# Altium PCB koruza-move-driver-PCB.PcbDoc
Units mil, origin at the board's own origin, x right, y up, seen from the top; angles counter-clockwise.
Board outline 2362.2 x 2362.2 mil, 2 copper layers (Top Layer, Bottom Layer), stack 50 mil thick; 46 components, 44 nets, 201 pads, 185 vias.
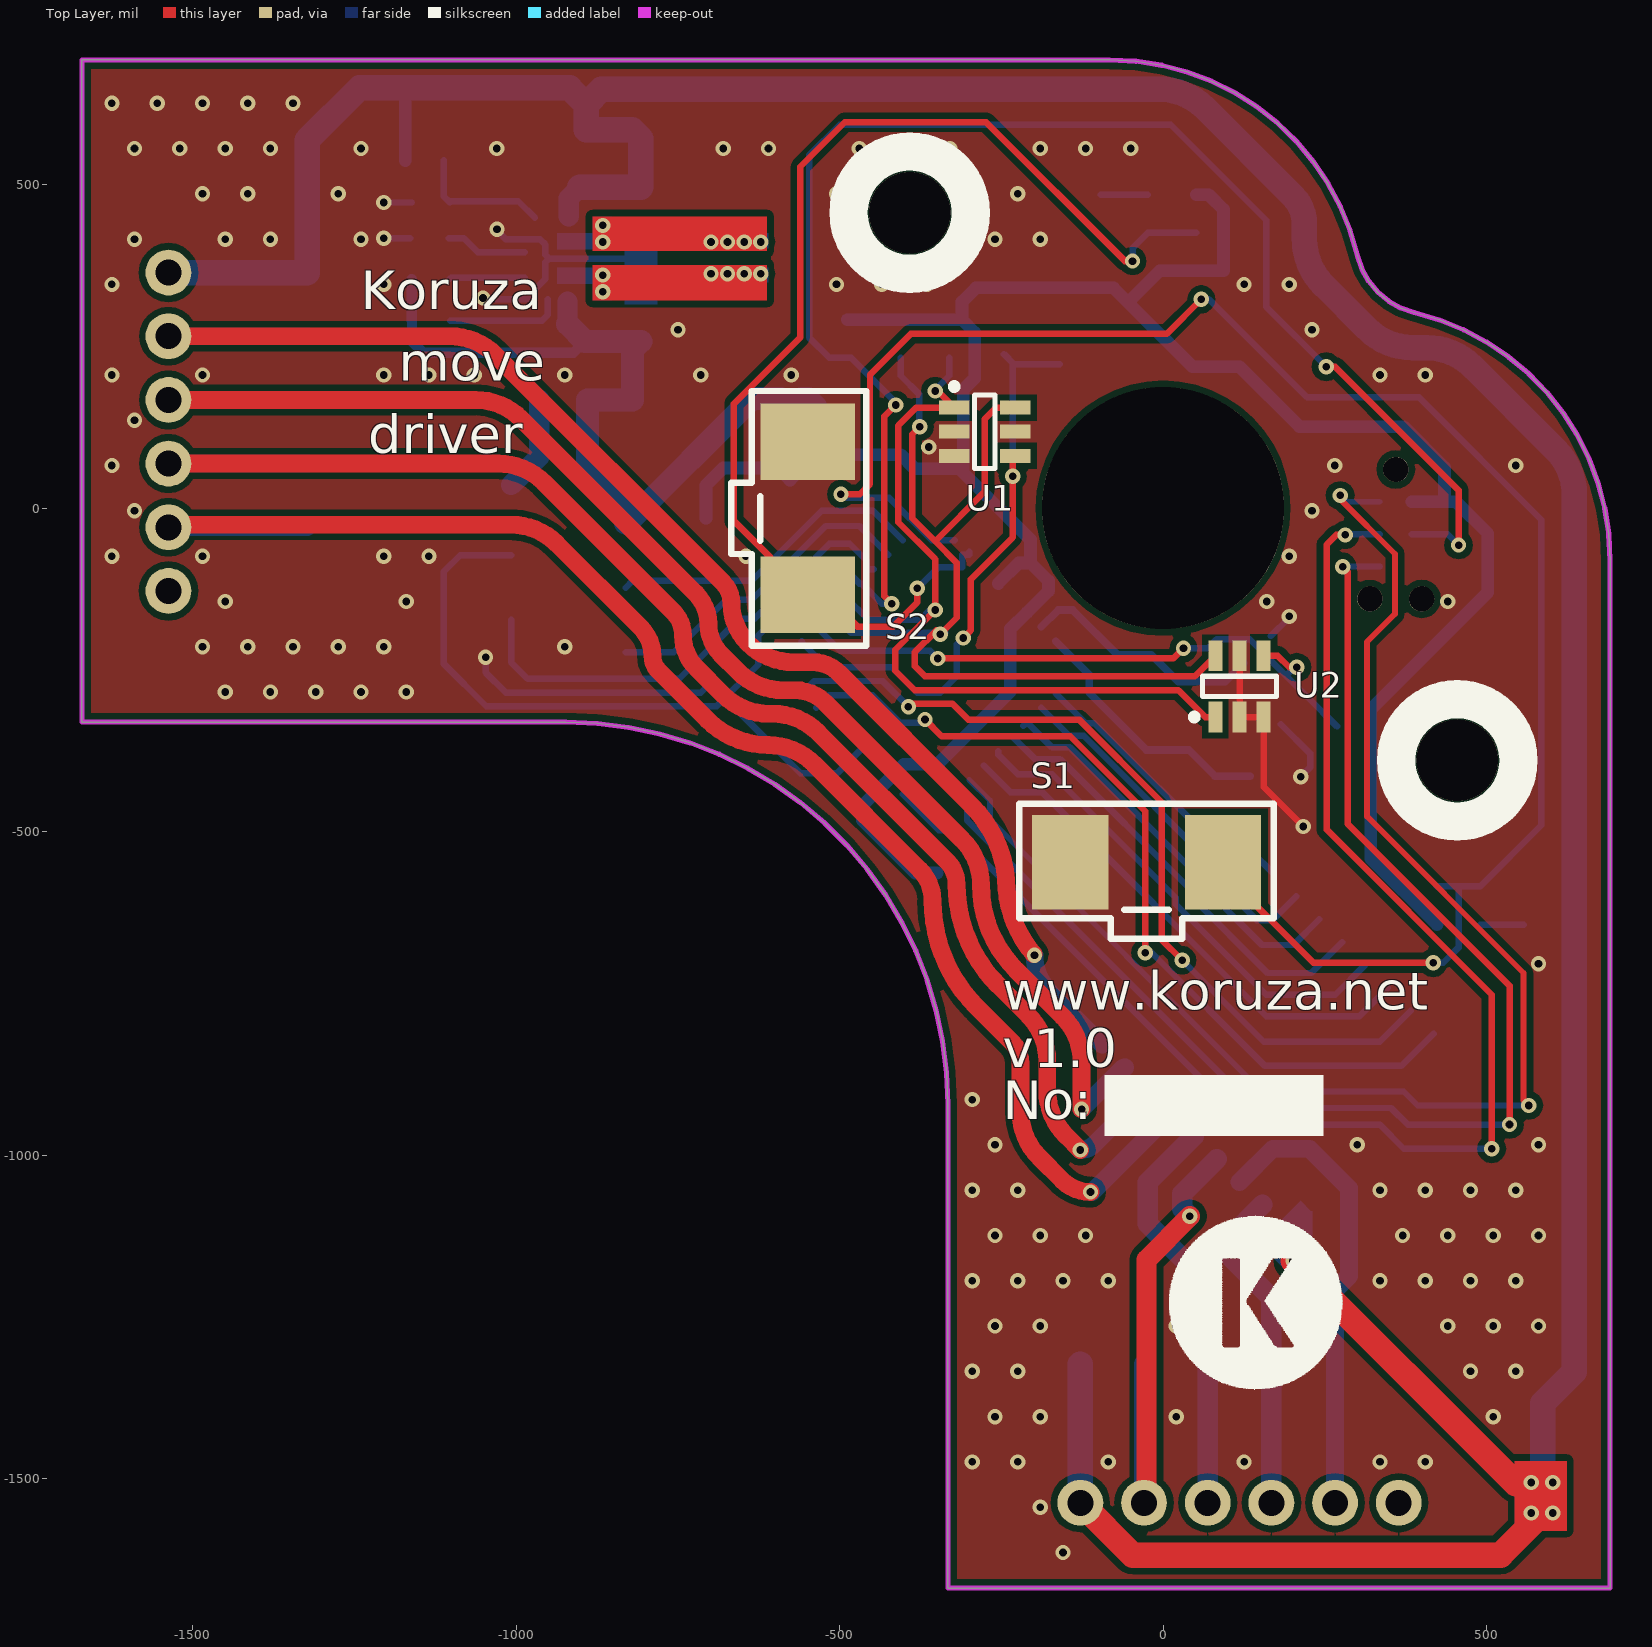
[diagram p0: Top Layer view]
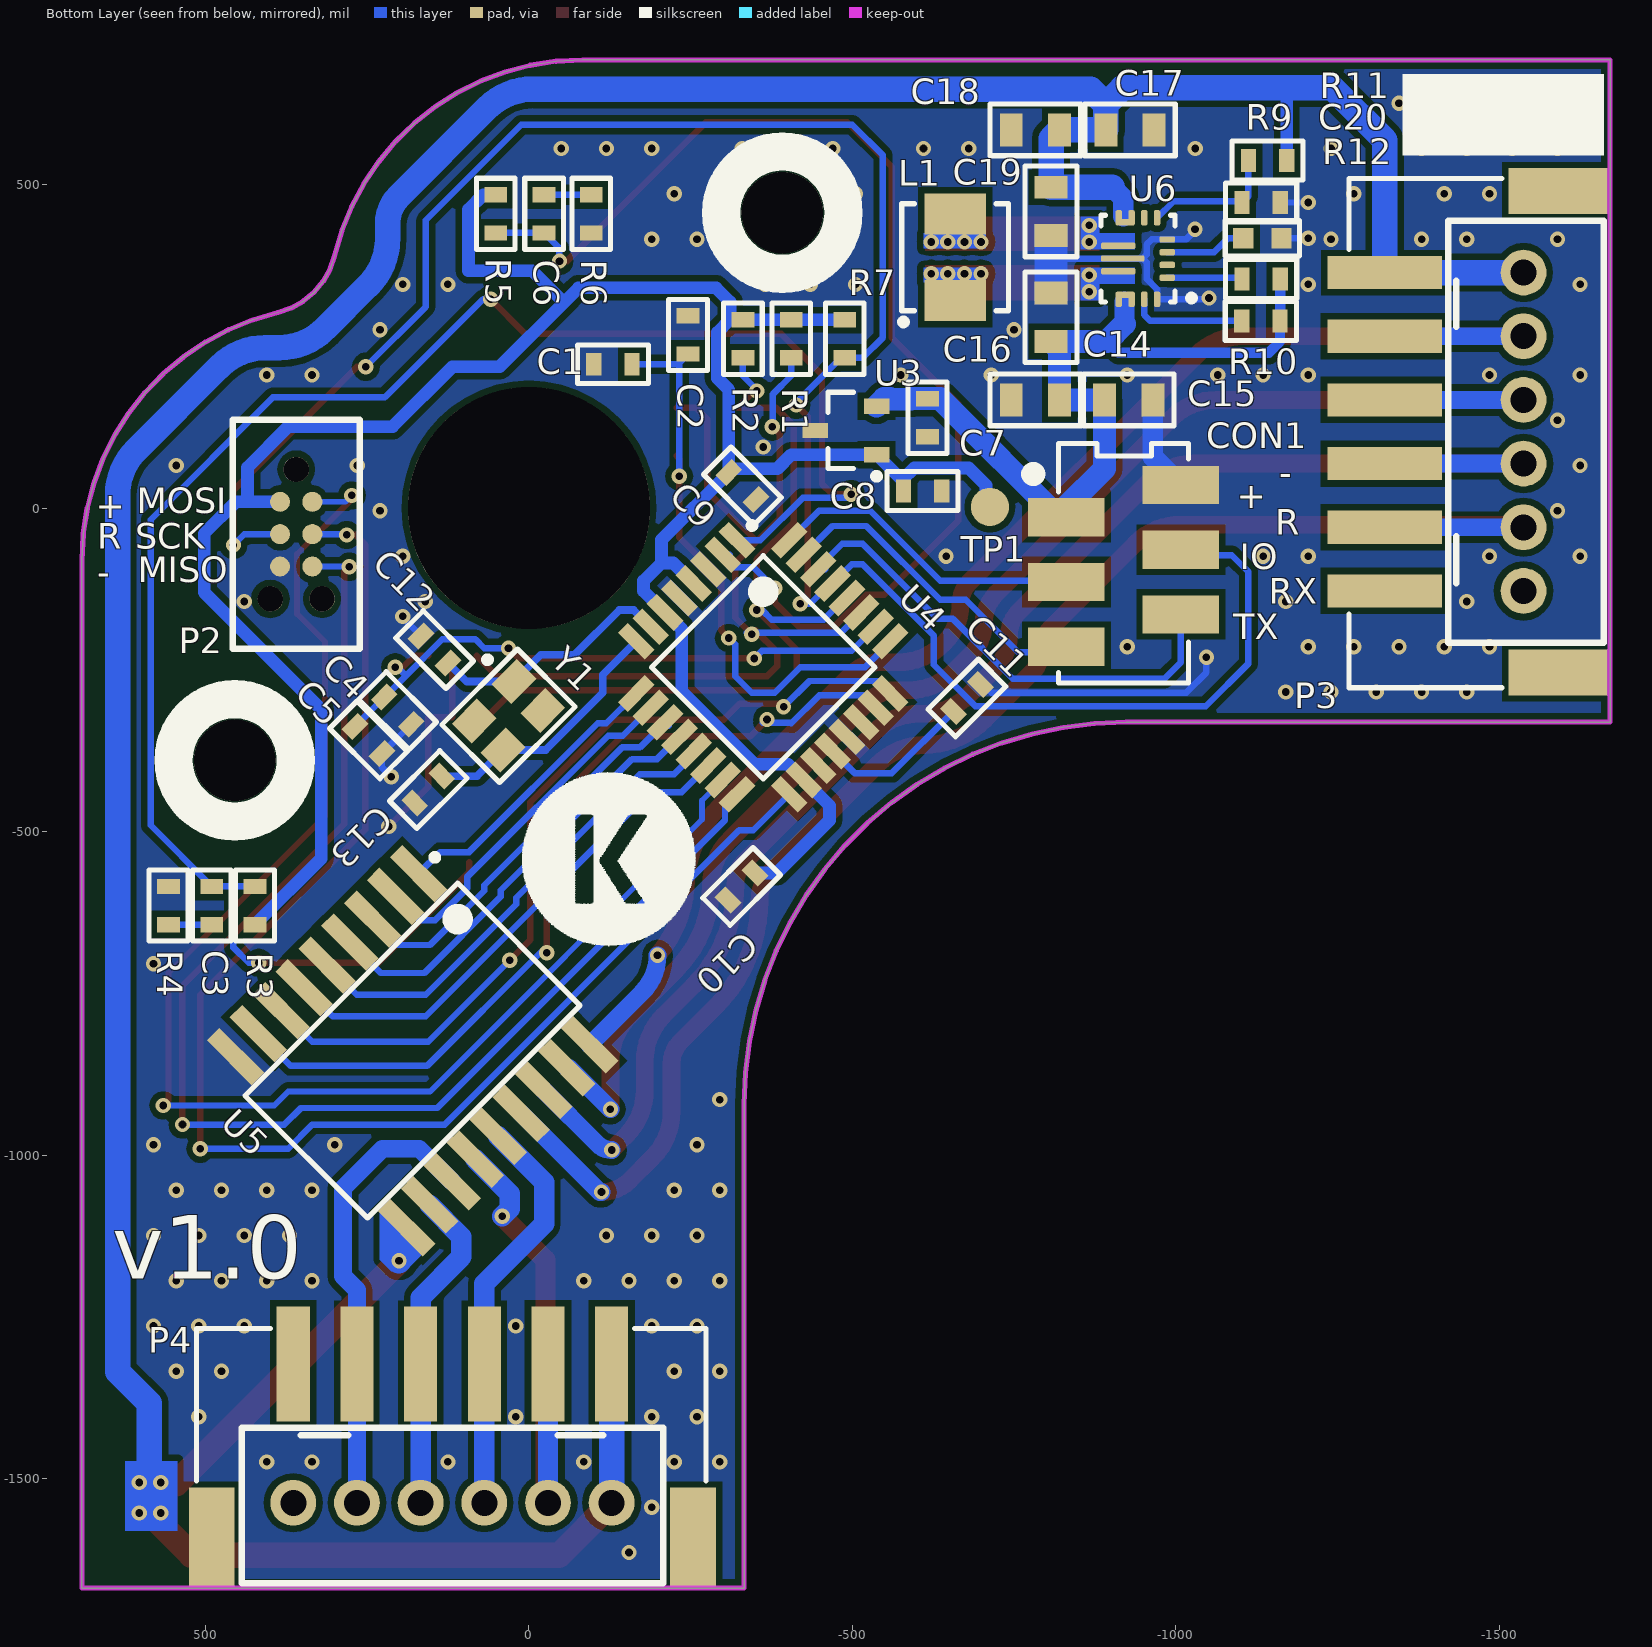
[diagram p1: Bottom Layer view, seen from below]

## Layer stack, top to bottom
Top Solder: solder mask 0.4, Solder Resist, Dk 3.5
Top Layer: signal copper 1.378
Dielectric 1: dielectric 47.2441, FR-4, Dk 4.8
Bottom Layer: signal copper 1.378
Bottom Solder: solder mask 0.4, Solder Resist, Dk 3.5

## Board outline
-523.26,-486.78 -488.75,-521.29 -457.2,-558.54 -428.84,-598.26 -403.85,-640.19 -382.42,-684.04 -364.67,-729.51 -350.75,-776.29 -340.73,-824.06 -334.69,-872.49 -332.68,-921.26 -332.68,-1669.29 690.95,-1669.29 690.95,-80.67 688.86,-40.23 682.64,-0.21 672.33,38.96 658.05,76.86 639.96,113.1 618.24,147.28 593.12,179.05 564.87,208.07 533.79,234.04 500.21,256.68 464.48,275.74 426.97,291.04 388.1,302.4 367.51,309.34 348.55,319.92 331.84,333.81 317.96,350.51 307.37,369.48 300.43,390.07 289.07,428.94 273.78,466.44 254.71,502.18 232.07,535.76 206.11,566.84 177.08,595.09 145.31,620.21 111.13,641.93 74.89,660.02 36.99,674.3 -2.18,684.6 -42.2,690.83 -82.64,692.91 -1671.26,692.91 -1671.26,-330.71 -923.23,-330.71 -874.46,-332.73 -826.03,-338.76 -778.26,-348.78 -731.48,-362.71 -686.01,-380.45 -642.16,-401.89 -600.23,-426.87 -560.5,-455.23

## Design rules (kind name [scope] priority, off if disabled: settings)
Clearance Clearance_1 [InPolygon vs not InNet('GND')] p1: gap=10
Clearance [All] p2: gap=8
DiffPairsRouting [All] p1: maxlimit=100 minlimit=8 mostfreqgap=10 toplayer_minwidth=8 toplayer_maxwidth=100 toplayer_prefwidth=15 bottomlayer_minwidth=8 bottomlayer_maxwidth=100 bottomlayer_prefwidth=15 maxuncoupledlength=500
HoleSize [All] p1: absolutevalues=TRUE maxlimit=39370.08 minlimit=0 maxpercent=80.000 minpercent=20.000
MinimumSolderMaskSliver [All] p1: minsoldermaskwidth=1
PlaneConnect [All] p1: planeconnectstyle=Direct reliefexpansion=20 reliefentries=4 reliefconductorwidth=10 reliefairgap=10
PolygonConnect [All] p1: connectstyle=Direct reliefconductorwidth=10 reliefentries=4 polygonreliefangle="90 Angle" airgapwidth=10
RoutingVias [All] p1: holewidth=11.81 width=23.62 viastyle="Through Hole" minholewidth=11.81 minwidth=23.62 maxholewidth=11.81 maxwidth=23.62
SilkToSilkClearance [All] p1: silktosilkclearance=0
SilkToSolderMaskClearance [IsPad] p1: minsilkscreentomaskgap=0 clearancetoexposedcopper=TRUE
SolderMaskExpansion [All] p1: expansion=4
Width [All] p1: maxlimit=100 minlimit=8 preferedwidth=10
24 further rules are at their usual default settings.

## Classes and differential pairs
component class "PAGE3 - SENSOR_SWITCHES": C1 C2 C3 C4 C5 C6 R1 R2 R3 R4 R5 R6 S1 S2 U1 U2
component class "PAGE4 - MOTOR_DRIVERS": P3 P4 U5
component class "PAGE2 - MCU": C7 C8 C9 C10 C11 C12 C13 C14 C15 C16 C17 C18 C19 C20 CON1 L1 P2 R7 R9 R10 R11 R12 TP1 U3 U4 U6 Y1

## Components (designator, comment, footprint, x,y, rotation, side; value= is the part's Value field where it differs from the comment)
C1 "0603" 0603_HANDSOLDERING -129.92,222.44 r180 bottom
C2 "0603" 0603_HANDSOLDERING -246.06,267.72 r270 bottom
C3 "0603" 0603_HANDSOLDERING 490.16,-614.17 r90 bottom
C4 "0603" 0603_HANDSOLDERING 202.76,-312.99 r45 bottom
C5 "0603" 0603_HANDSOLDERING 248.03,-358.27 r45 bottom
C6 "0603" 0603_HANDSOLDERING -23.62,454.96 r270 bottom locked
C7 "0603" 0603_HANDSOLDERING -616.14,139.76 r90 bottom
C8 "0603" 0603_HANDSOLDERING -608.43,26.66 r0 bottom
C9 "0603" 0603_HANDSOLDERING -329.93,34.24 r45 bottom
C10 "0603" 0603_HANDSOLDERING -328.74,-584.64 r135 bottom locked
C11 "0603" 0603_HANDSOLDERING -677.17,-293.31 r315 bottom
C12 "0603" 0603_HANDSOLDERING 145.67,-218.5 r225 bottom
C13 "0603" 0603_HANDSOLDERING 155.51,-435.04 r135 bottom
C14 "10uF" CAP0805 -807.09,295.28 r270 bottom
C15 "22u" CAP0805 -927.17,167.32 r0 bottom
C16 "22u" CAP0805 -782.97,167.32 r180 bottom
C17 "22u" CAP0805 -929.13,584.65 r0 bottom
C18 "22u" CAP0805 -782.97,584.65 r180 bottom
C19 "10uF" CAP0805 -807.09,458.66 r90 bottom
C20 "100nF" CAP0603 -1133.86,417.32 r0 bottom
CON1 "MICROMATCH 6 SMD" MICROMATCH2X3 -830.71,-14.17 r90 bottom
L1 "1.5uH" FDSD0402 -658.96,387.8 r0 bottom
P2 "Tag Connect" "TAG CONNECT" 359.65,-40.16 r270 bottom
P3 "JST Motor Connector" "JST S6B-XH-SM4-TB - duplicate" -1456.69,118.11 r90 bottom locked
P4 "JST Motor Connector" "JST S6B-XH-SM4-TB - duplicate" 118.11,-1456.69 r180 bottom locked
R1 "0603" 0603_HANDSOLDERING -405.51,261.81 r90 bottom locked
R2 "0603" 0603_HANDSOLDERING -330.71,261.81 r90 bottom locked
R3 "0603" 0603_HANDSOLDERING 423.23,-614.17 r270 bottom
R4 "0603" 0603_HANDSOLDERING 557.09,-614.17 r270 bottom
R5 "0603" 0603_HANDSOLDERING 51.18,454.96 r90 bottom locked
R6 "0603" 0603_HANDSOLDERING -96.45,454.96 r90 bottom locked
R7 "0603" 0603_HANDSOLDERING -488.19,261.81 r270 bottom
R9 "402k" RES0603 -1141.73,537.4 r180 bottom
R10 "10k" RES0603 -1131.4,289.37 r180 bottom
R11 "39k" RES0603 -1131.89,472.44 r0 bottom
R12 "10k" RES0603 -1131.89,354.33 r0 bottom
S1 "SW-PB" KSS241G_SWITCH -25.59,-547.24 r0 top locked
S2 "SW-PB" KSS241G_SWITCH -549.21,-15.75 r270 top locked
TP1 "TEST_POINT" TEST_POINT -712.6,1.97 r180 bottom
U1 "TLV493D-A1B6" TLV493D_TSOP6 -275.59,118.11 r0 top locked
U2 "TLV493D-A1B6" TLV493D_TSOP6 118.11,-275.59 r90 top locked
U3 "LM3480-3.3" LM3480_SOT23-3 -490.16,120.08 r0 bottom
U4 "atmega328" ATMEGA328_TQFP32 -362.2,-246.06 r225 bottom
U5 "ULN2803A" ULN2803A_SOIC18 179.71,-838.47 r225 bottom
U6 "TPS630701RNMT" "VQFN TPS" -948.82,385.83 r90 bottom
Y1 "XTAL" XTAL_SMALL 31.5,-320.87 r135 bottom

## Footprints (in the part's own frame and the unit in brackets; to place one, negate y for a bottom-side part, rotate by r counter-clockwise, add the part's x,y. Pads: shape width x height; smd on the part's side, far side on the other; paste and mask are expansions set on the pad)
0603_HANDSOLDERING [mm] "Chip Resistor, 2-Leads, Body 1.6x0.8mm, IPC Medium Density"
  rect 0.6x0.9 smd: 1(-0.75,0) 2(0.75,0)
  silkscreen extent -1.4,-0.76 1.4,0.76, body extent -0.8,-0.42 0.8,0.42, height 0.8
ATMEGA328_TQFP32 [mm] "TQFP, 32-Leads, Body 7,00x7,00mm, Pitch 0,80mm, IPC Medium Density"
  rect 1.5x0.55 smd: 1(-4.25,2.8) 2(-4.25,2) 3(-4.25,1.2) 4(-4.25,0.4) 5(-4.25,-0.4) 6(-4.25,-1.2) 7(-4.25,-2) 8(-4.25,-2.8) 17(4.25,-2.8) 18(4.25,-2) 19(4.25,-1.2) 20(4.25,-0.4) 21(4.25,0.4) 22(4.25,1.2) 23(4.25,2) 24(4.25,2.8)
  rect 0.55x1.5 smd: 9(-2.8,-4.25) 10(-2,-4.25) 11(-1.2,-4.25) 12(-0.4,-4.25) 13(0.4,-4.25) 14(1.2,-4.25) 15(2,-4.25) 16(2.8,-4.25) 25(2.8,4.25) 26(2,4.25) 27(1.2,4.25) 28(0.4,4.25) 29(-0.4,4.25) 30(-1.2,4.25) 31(-2,4.25) 32(-2.8,4.25)
  silkscreen extent -4.37,-3.1 3.1,3.75, body extent -3.5,-3.5 3.5,3.5, height 1.2
CAP0603 [mm]
  rect 0.8x0.8 smd: 1(-0.75,0) 2(0.75,0)
  silkscreen extent -1.46,-0.7 1.46,0.7, body extent -0.8,-0.4 0.8,0.4, height 0.9
CAP0805 [mm]
  rect 0.9x1.3 smd: 1(-0.95,0) 2(0.95,0)
  silkscreen extent -1.78,-1.02 1.78,1.02, body extent -1,-0.6 1,0.6, height 1.5
FDSD0402 [mm]
  rect 2.4x1.6 smd: 1(0,1.7) 2(0,-1.7)
  silkscreen extent -2.1,-2.1 2.16,2.66, body extent -2.1,-2.2 2.1,2.2, height 2.1
"JST S6B-XH-SM4-TB - duplicate" [mm] "JST S6B-XH-SM4-TB SMT motor connector"
  round 1.8 hole 1.02: 1(6.25,-2.05) 2(3.75,-2.05) 3(1.25,-2.05) 4(-1.25,-2.05) 5(-3.75,-2.05) 6(-6.25,-2.05)
  rect 1.3x4.5 smd: 1(6.25,3.4) 2(3.75,3.4) 3(1.25,3.4) 4(-1.25,3.4) 5(-3.75,3.4) 6(-6.25,3.4)
  rect 1.8x3.9 smd: ""(-9.45,-3.4) ""(9.45,-3.4)
  silkscreen extent -10.05,-5.2 9.95,4.8, body extent -9.97,-5.22 9.98,4.78, height 6
KSS241G_SWITCH [mm] "KSS241G SMT Side Actuated Switch"
  rect 3x3.7 smd: 1(-3,0) 2(3,0)
  silkscreen extent -5,-3 5,2.3, body extent -2.79,-2.79 2.79,1.91, height 1.7
LM3480_SOT23-3 [mm] "SOT23, 3-Leads, Body 2,92x2,37mm, Pitch 0,95mm, IPC Medium Density"
  rect 1x0.6 smd: 1(-1.2,0.95) 2(-1.2,-0.95) 3(1.2,0)
  silkscreen extent -1.32,-1.5 0.7,1.92, body extent -0.7,-1.52 0.7,1.52, height 1.12
MICROMATCH2X3 [mm]
  rect 1.5x3 smd: 1(0,0) 2(-2.54,0) 3(-5.08,0) 4(1.27,-4.5) 5(-1.27,-4.5) 6(-3.81,-4.5)
  silkscreen extent -6.5,-4.8 2.9,1.52, body extent -6.67,-5.95 2.88,1.17, height 5.26
RES0603 [mm]
  rect 0.6x0.9 smd: 1(-0.75,0) 2(0.75,0)
  silkscreen extent -1.4,-0.76 1.4,0.76, body extent -0.8,-0.42 0.8,0.42, height 0.8
"TAG CONNECT" [mm] "TC2030-CTX-NL"
  round 0.787 smd paste-0.787: 1(-1.27,-0.635) 2(-1.27,0.635) 3(0,-0.635) 4(0,0.635) 5(1.27,-0.635) 6(1.27,0.635)
  round 0.991 hole 0.991 unplated: ""(-2.54,0) ""(2.54,-1.015) ""(2.54,1.015)
  silkscreen extent -4.5,-2.5 4.5,2.5
TEST_POINT [mm]
  round 1.5 smd: 1(0,0)
TLV493D_TSOP6 [mm] "TSOP, 6-Leads, Body 2,90x1,60mm, Pitch 0,95mm, IPC Medium Density"
  rect 1.2x0.55 smd: 1(-1.2,0.95) 2(-1.2,0) 3(-1.2,-0.95) 4(1.2,-0.95) 5(1.2,0) 6(1.2,0.95)
  silkscreen extent -1.32,-1.45 0.4,1.9, body extent -0.8,-1.45 0.8,1.45, height 1.1
ULN2803A_SOIC18 [mm] "SOIC, 18-Leads, Body 11,55x7,50mm, Pitch 1,27mm, IPC Medium Density"
  rect 2.5x0.7 smd: 1(-4.75,5.08) 2(-4.75,3.81) 3(-4.75,2.54) 4(-4.75,1.27) 5(-4.75,0) 6(-4.75,-1.27) 7(-4.75,-2.54) 8(-4.75,-3.81) 9(-4.75,-5.08) 10(4.75,-5.08) 11(4.75,-3.81) 12(4.75,-2.54) 13(4.75,-1.27) 14(4.75,0) 15(4.75,1.27) 16(4.75,2.54) 17(4.75,3.81) 18(4.75,5.08)
  silkscreen extent -4.87,-5.9 3.4,6.1, body extent -3.8,-5.9 3.8,5.9, height 2.65
"VQFN TPS" [mm]
  rrect50% 0.25x0.6 smd: 1(-0.75,-0.962) 2(-0.25,-0.962) 3(0.25,-0.962) 4(0.75,-0.962)
  rrect50% 0.6x0.25 smd: 5(1.6,-0.562) 6(1.6,-0.062) 7(1.6,0.438) 8(1.6,0.938) 12(-1.6,0.938) 13(-1.6,0.438) 14(-1.6,-0.062) 15(-1.6,-0.562)
  rrect50% 0.25x1.35 smd: 9(0.5,0.963) 11(-0.5,0.963)
  rrect50% 0.25x1.7 smd: 10(0,0.788)
  rrect50% 0.25x0.7 smd: ""(-1.425,0.688) ""(1.425,0.688)
  silkscreen extent -1.7,-2.04 1.7,1.64, body extent -1.56,-1.12 1.56,1.5, height 1
XTAL_SMALL [mm] "3.2 X 2.5 mm SMD crystal"
  rect 1.4x1.1 smd: 1(1.1,0.8) 2(-1.1,-0.8) 3(-1.1,0.8) 3(1.1,-0.8)
  silkscreen extent -2.1,-1.6 2.1,2.26, body extent -1.6,-1.25 1.6,1.25, height 0.7

## Part data
C1 C2 C3 C4 C5 C6 C7 C8 C9 C10 C11 C12 C13: library part capacitor_ceramic, "Ceramic Capacitor"
C14 C19: library part "10uF /16V", "TDK - CGA4J1X5R1C106K125AC - CAP, MLCC, X5R, 10UF, 16V, 0805"
C15 C16 C17 C18: library part "22u 6.3V 0805", "MULTICOMP - MC0805X226M6R3CT - CAP, MLCC, X5R, 22UF, 0805"
C20: "MURATA - GRM188R71C104KA01J - CAP, MLCC, X7R, 0.1UF, 16V, 0603"
CON1: library part 188275-6, "AMP - TE CONNECTIVITY - 188275-6 - CONNECTOR, RCPT, 6POS, 2ROW, 1.27MM"
L1: library part "1.5uH 5.1A", "MURATA - FDSD0420-H-1R5M=P3 - INDUCTOR, SHIELDED, 1.5UH, 5.1A, 20%"
P2: "TC2030-CTX-NL"
P3 P4: library part motor_connector_2, "JST unipolar motor connector"
R1 R2 R3 R4 R5 R6 R7: library part resistor, "resistor"
R9: "MULTICOMP - MC0063W06031402K - RES, THICK FILM, 402K, 1%, 0.063W, 0603"
R10 R12: "MULTICOMP - MCMR06X103 JTL - RES, CERAMIC, 10K, 5%, 0.1W, 0603"
R11: "VISHAY - CRCW060339K0FKEAHP - RES, THICK FILM, 39K, 1%, 0.25W, 0603"
S1 S2: "Limit Switch"
TP1: "Test point"
U1 U2: "3D Magnetic Sensor"
U3: library part LM3480, "LM3480-3.3 3.3V LDO regulator"
U4: "32 TQFP atmega328"
U5: "Darlington array, 8 channels"
U6: "TEXAS INSTRUMENTS - TPS630701RNMT - DC/DC CONV, BUCK-BOOST, 2.4MHZ, VQFN-15"
Y1: "Crystal Oscillator"

## Free pads (board coordinates)
  round 125.98 hole 125.98 unplated: 1(-391.73,456.69) 1(454.72,-389.76)
  round 374.02 hole 374.02 unplated: 1(0,0)

## Via types
v1: diameter 23.62, hole 11.81, Top Layer to Bottom Layer, tented both sides, 185 vias

## Nets (pads, with @x,y where several pads share a name; then routed paths per layer and width w, separated by ;. In a path a pad name is that pad's centre, name@x,y a point inside that pad or via, vN(x,y) a via of type N, cw(c..) or ccw(c..) an arc to the next point about the centre after c; other vN are vias at no path point)
3V3: C8.2 C9.2 C10.2 P2.1 R1.2 R2.2 R3.2 R5.2 R7.1 TP1.1 U3.1 U4.4 U4.6 U4.18 | length 4002
  Bottom Layer w19.68: TP1.1@-706.69,-15.75 -706.69,35.43 -679.9,62.22 -595.69,62.22 -576.77,43.31 U3.1 -405.51,82.68 -383.86,61.02 -314.96,61.02 C9.2 ; R7.1 R1.2 R2.2 -311.02,291.34 ; C10.2 -383.08,-563.77 -464.57,-482.28 -464.57,-459.78 U4.18 -400.74,-395.95 -348.71,-395.95 -236.22,-283.46 -236.22,-186.89 U4.6 -177.33,-128 -177.33,-112.37 -205.06,-84.65 ; U4.4 -223.06,-84.65 -205.06,-84.65 ; R5.2 70.63,484.49 93.5,461.61 93.5,367.13 -4.92,367.13 -54.01,318.03 ; P2.1 452.76,9.84 501.97,-39.37 501.97,-129.92 320.87,-311.02 320.87,-541.34 R3.2 ; 435.04,9.84 435.04,62.99 372.05,125.98 210.63,125.98 118.11,218.5 45.52,218.5 -54.01,318.03 ; -311.02,291.34 -311.02,318.9 -289.37,340.55 -76.53,340.55 -54.01,318.03 ; -311.02,291.34 -291.34,271.65 -291.34,200.79 -309.06,183.07 C9.2 ; C9.2 -205.06,-48.88 -205.06,-84.65
3V3_SENSOR1: C1.2 C2.2 U1.4 U4.25 | length 928.6
  Top Layer w10: v1(-309.06,-200.79) -297.24,-188.98 -297.24,-110.24 -232.28,-45.28 v1(-232.28,49.21) -232.28,76.77 U1.4
  Bottom Layer w10: U4.25 -558.47,-207.28 -519.68,-246.06 -419.29,-246.06 -379.92,-285.43 -344.49,-285.43 -318.9,-259.84 -318.9,-210.63 v1(-309.06,-200.79) ; C2.2 -230.32,222.44 C1.2 ; v1(-232.28,49.21) -232.28,222.44
3V3_SENSOR2: C4.2 C5.2 U2.4 U4.26 | length 974.5
  Top Layer w10: v1(-348.43,-232.28) 15.75,-232.28 v1(31.5,-216.54) ; U2.4 177.17,-228.35 194.88,-246.06 v1(206.69,-246.06)
  Bottom Layer w10: U4.26 -499.15,-220.47 -360.24,-220.47 v1(-348.43,-232.28) ; v1(31.5,-216.54) 68.9,-216.54 82.68,-202.76 133.86,-202.76 188.98,-257.87 ; v1(206.69,-246.06) 202.76,-246.06 190.94,-257.87 188.98,-257.87 ; C5.2 C4.2 223.22,-292.11 188.98,-257.87
+5V: C7.2 C14.2 C15.2 C16.2 CON1.1 R10.2 R12.1 U3.2 U6.12 U6.13 U6.@-921.75,329.72 | length 1296.3
  Bottom Layer w15.75: R12.1 -1161.42,289.86 R10.2 -1160.93,257.38 -1143.7,240.16 -911.42,240.16 -893.7,257.87
  Bottom Layer w31.5: -920.64,284.81 -920.64,318.9
  Bottom Layer w35.43: -920.64,284.81 -893.7,257.87 C14.2 -820.37,244.59 C16.2 C15.2 -889.76,61.02 -830.71,1.97 -830.71,-22.83 -827.95,-22.83 -635.83,169.29 -591.38,169.29 -590.38,168.3 -559.3,168.3 -558.3,169.29 -549.21,169.29 U3.2
GND: C1.1 C2.1 C4.1 C5.1 C7.1 C8.1 C9.1 C10.1 C11.1 C12.1 C13.1 C14.1 C15.1 C16.1 C17.1 C18.1 C19.1 C20.1 CON1.4 P2.5 R4.1 R6.1 R11.1 S1.1 S2.1 U1.2 U1.3 U1.5 U2.2 U2.3 U2.5 U3.3 U4.3 U4.5 U4.21 U5.9 U6.4 U6.10 U6.15 | length 1518.6
  Top Layer w10: U2.5 U2.2 U2.3 155.51,-431.1 v1(216.54,-492.13)
  Bottom Layer w10: v1(-1204.72,417.32) C20.1 ; v1(-1204.72,472.44) R11.1 ; v1(-1051.18,324.8) -1051.18,322.83 U6.15 -970.96,338.37 -954.72,354.61 -954.72,379.92 U6.10@-948.82,385.83 ; v1(-1047.24,-230.32) -1047.24,-253.94 -1015.75,-285.43 -714.57,-285.43 -701.56,-272.43 C11.1 ; v1(-1029.53,431.1) -1029.53,429.13 -1015.75,415.35 U6.4 -962.6,415.35 -954.72,407.48 -954.72,391.73 U6.10@-948.82,385.83 ; -795.28,383.86 -797.24,385.83 U6.10 U6.10@-948.82,385.83 ; C12.1 194.88,-169.29 v1(194.88,-167.32) ; C4.1 C5.1 227.15,-400.8 v1(212.6,-415.35)
  Bottom Layer w31.5: CON1.4 -964.57,79.13 C15.1
  other v1: -154.84,-1614.17 -189.84,-1544.17 -294.84,-1474.17 -224.84,-1474.17 -84.84,-1474.17 125.16,-1474.17 335.16,-1474.17 405.16,-1474.17 -259.84,-1404.17 -189.84,-1404.17 20.16,-1404.17 510.16,-1404.17 -294.84,-1334.17 -224.84,-1334.17 475.16,-1334.17 545.16,-1334.17 -259.84,-1264.17 -189.84,-1264.17 20.16,-1264.17 440.16,-1264.17 510.16,-1264.17 580.16,-1264.17 -294.84,-1194.17 -224.84,-1194.17 -154.84,-1194.17 -84.84,-1194.17 335.16,-1194.17 405.16,-1194.17 475.16,-1194.17 545.16,-1194.17 -259.84,-1124.17 -189.84,-1124.17 -119.84,-1124.17 370.16,-1124.17 440.16,-1124.17 510.16,-1124.17 580.16,-1124.17 -294.84,-1054.17 -224.84,-1054.17 335.16,-1054.17 405.16,-1054.17 475.16,-1054.17 545.16,-1054.17 -259.84,-984.17 300.16,-984.17 580.16,-984.17 -294.84,-914.17 580.16,-704.17 -1449.84,-284.17 -1379.84,-284.17 -1309.84,-284.17 -1239.84,-284.17 -1169.84,-284.17 -1484.84,-214.17 -1414.84,-214.17 -1344.84,-214.17 -1274.84,-214.17 -1204.84,-214.17 -924.84,-214.17 -1449.84,-144.17 -1169.84,-144.17 160.16,-144.17 440.16,-144.17 -1624.84,-74.17 -1484.84,-74.17 -1204.84,-74.17 -1134.84,-74.17 -644.84,-74.17 195.16,-74.17 -1589.84,-4.17 230.16,-4.17 -1624.84,65.83 265.16,65.83 545.16,65.83 -362.2,94.49 -1589.84,135.83 -1624.84,205.83 -1484.84,205.83 -1204.84,205.83 -1134.84,205.83 -1064.84,205.83 -924.84,205.83 -714.84,205.83 -574.84,205.83 335.16,205.83 405.16,205.83 -749.84,275.83 230.16,275.83 -1624.84,345.83 -1204.84,345.83 -504.84,345.83 -434.84,345.83 -364.84,345.83 125.16,345.83 195.16,345.83 -1589.84,415.83 -1449.84,415.83 -1379.84,415.83 -1239.84,415.83 -469.84,415.83 -259.84,415.83 -189.84,415.83 -1484.84,485.83 -1414.84,485.83 -1274.84,485.83 -504.84,485.83 -294.84,485.83 -224.84,485.83 -1589.84,555.83 -1519.84,555.83 -1449.84,555.83 -1379.84,555.83 -1239.84,555.83 -1029.84,555.83 -679.84,555.83 -609.84,555.83 -469.84,555.83 -399.84,555.83 -329.84,555.83 -189.84,555.83 -119.84,555.83 -49.84,555.83 -1624.84,625.83 -1554.84,625.83 -1484.84,625.83 -1414.84,625.83 -1344.84,625.83
GPIO: CON1.2 U4.32 | length 496.4
  Bottom Layer w10: CON1.2@-830.71,-122.83 -820.08,-112.2 -635.83,-112.2 -527.56,-3.94 -448.43,-3.94 U4.32
MISO: P2.6 U4.16 | length 2107.4
  Top Layer w10: v1(277.56,-90.55) 285.43,-98.43 285.43,-488.19 535.43,-738.19 v1(535.43,-952.76)
  Bottom Layer w10: U4.16 -303.15,-461.02 -303.15,-482.28 141.73,-927.17 352.36,-927.17 377.95,-952.76 v1(535.43,-952.76) ; v1(277.56,-90.55) 277.95,-90.16 P2.6
MOSI: P2.2 U4.15 | length 2254.7
  Top Layer w9: v1(273.62,19.68) 273.62,13.78 358.27,-70.87 358.27,-163.39 314.96,-206.69 314.96,-476.38 557.09,-718.5 557.09,-915.35 v1(564.96,-923.23)
  Bottom Layer w9: U4.15 -267.72,-451.91 -267.72,-481.23 152.63,-901.57 372.05,-901.57 393.7,-923.23 v1(564.96,-923.23) ; v1(273.62,19.68) 283.46,9.84 P2.2
NetC3_1: C3.1 R4.2 | length 66.9
  Bottom Layer w10: C3.1 R4.2
NetC3_2: C3.2 R3.1 S1.2 U4.1 | length 2870
  Top Layer w10: v1(-498.03,21.65) -468.79,21.65 -453.04,37.4 -453.04,206.41 -389.76,269.68 5.91,269.68 v1(59.06,322.83) ; S1.2 92.52,-562.99 232.28,-702.76 v1(417.32,-702.76)
  Bottom Layer w10: v1(-498.03,21.65) -492.12,15.75 -423.23,15.75 -357.68,-49.8 U4.1 ; v1(59.06,322.83) 70.87,322.83 222.44,171.26 395.67,171.26 584.65,-17.72 584.65,-490.16 C3.2 460.63,-584.64 ; v1(417.32,-702.76) 433.07,-702.76 456.69,-679.13 456.69,-588.58 460.63,-584.64 ; R3.1 460.63,-584.64
NetC6_1: C6.1 R6.2 | length 72.8
  Bottom Layer w10: R6.2 C6.1
NetC6_2: C6.2 R5.1 S2.2 U4.2 | length 1855.2
  Top Layer w10: v1(-379.92,-124.02) -379.92,-145.67 -417.32,-183.07 -472.44,-183.07 -521.65,-133.86 S2.2 -663.39,-19.69 -663.39,161.42 -561.02,263.78 -561.02,527.56 -492.13,596.46 -273.62,596.46 -59.06,381.89 v1(-47.24,381.89)
  Bottom Layer w10: v1(-379.92,-124.02) -347.24,-91.33 -310.41,-91.33 -310.41,-72.07 U4.2 U4.2@-299.57,-67.28 ; v1(-47.24,381.89) -47.24,401.81 C6.2 R5.1
NetC11_2: C11.2 U4.20 | length 240.4
  Bottom Layer w10: C11.2 -561.02,-409.45 -503.32,-409.45 U4.20
NetC12_2: C12.2 U4.7 Y1.1 | length 381.4
  Bottom Layer w11.81: U4.7 -162.27,-157.48 -139.76,-157.48 -70.5,-226.74 -18.08,-226.74 Y1.1 96.2,-267.97 C12.2
NetC13_2: C13.2 U4.8 Y1.2 | length 403.3
  Bottom Layer w11.81: U4.8 -114.17,-257.46 -114.17,-285.43 -25.85,-373.76 Y1.2 80.25,-414.16 C13.2
NetC20_2: C20.2 U6.3 | length 126.6
  Bottom Layer w10: C20.2 -1080.71,417.32 -1059.06,395.67 U6.3
NetL1_1: L1.1 U6.11
  other v1: -866.14,334.65 -866.14,360.24 -698.82,362.2 -673.23,362.2 -647.64,362.2 -622.05,362.2
NetL1_2: L1.2 U6.9
  other v1: -866.14,411.42 -698.82,411.42 -673.23,411.42 -647.64,411.42 -622.05,411.42 -866.14,437.01
NetP3_2: P3.2 U5.18 | length 2204.1
  Top Layer w27.56: P3.2@-1537.4,265.75 -1102.44,265.75 cw(c-1102.44,165.75) -1031.73,236.46 -680.47,-114.81 cw(c-712.2,-146.54) -667.32,-146.54 ccw(c-579.14,-146.54) -641.49,-208.9 ccw(c-570.78,-138.19) -570.78,-238.19 -541.34,-238.19 cw(c-541.34,-295.22) -501.02,-254.88 ; -501.01,-254.89 -295.2,-460.7 cw(c-423.34,-588.84) -242.13,-588.84 ccw(c-60.35,-572.35) v1@-200.55,-689.21
  Bottom Layer w27.56: P3.2@-1537.4,265.75 P3.2@-1322.83,265.75 ; v1(-198.82,-690.94) ccw(c-118.03,-690.94) -175.16,-748.07 U5.18
NetP3_3: P3.3 U5.17 | length 2308.5
  Top Layer w27.56: P3.3@-1537.4,167.32 -1063.08,167.32 cw(c-1063.08,67.32) -992.36,138.03 -722.24,-132.09 cw(c-769.29,-179.13) -702.76,-179.13 ccw(c-636.22,-179.13) -683.27,-226.18 -657.24,-252.21 ccw(c-586.53,-181.5) -586.53,-281.5 -568.9,-281.5 cw(c-568.9,-348.03) -521.85,-300.98 -310.79,-512.05 cw(c-381.5,-582.76) -281.5,-582.76 ccw(c-96.27,-582.76) -227.24,-713.74 -155.27,-785.71 cw(c-225.98,-856.42) -125.98,-856.42 v1(-125.98,-929.13)
  Bottom Layer w27.56: P3.3@-1537.4,167.32 P3.3@-1322.83,167.32 ; v1(-125.98,-929.13) -63.54,-866.69 cw(c-58.59,-871.64) U5.17
NetP3_4: P3.4 U5.16 | length 2337.3
  Top Layer w27.56: P3.4@-1537.4,68.9 -1027.64,68.9 cw(c-1027.64,-31.1) -956.93,39.61 -757.44,-159.89 cw(c-794.4,-196.85) -742.13,-196.85 ccw(c-670.84,-196.85) -721.25,-247.26 -680.08,-288.42 ccw(c-609.37,-217.71) -609.37,-317.71 -603.63,-317.71 cw(c-603.63,-417.71) -532.92,-347 -333.62,-546.31 ; -333.61,-546.31 cw(c-368.35,-581.04) -319.23,-581.04 ccw(c-97.16,-581.04) -254.18,-738.07 -208.42,-783.83 cw(c-279.13,-854.54) -179.13,-854.54 -179.13,-899.52 ccw(c-79.13,-899.52) -149.84,-970.23 v1(-127.95,-992.13)
  Bottom Layer w27.56: P3.4@-1537.4,68.9 P3.4@-1322.83,68.9 ; v1(-127.95,-992.13) ccw(c-127.95,-961.73) -106.46,-983.22 U5.16
NetP3_5: P3.5 U5.15 | length 2377.8
  Top Layer w27.56: P3.5@-1537.4,-29.53 cw(c-1527.9,-39.03) -1527.9,-25.59 -1007.96,-25.59 cw(c-1007.96,-125.59) -937.25,-54.88 -807.47,-184.66 cw(c-851.15,-228.35) -789.37,-228.35 ccw(c-756.1,-228.35) -779.63,-251.87 -704.27,-327.23 ccw(c-610.32,-233.28) -610.32,-366.14 cw(c-610.32,-466.14) -539.61,-395.43 -375.98,-559.06 cw(c-423.51,-606.58) -356.3,-606.58 ccw(c-124.11,-606.58) -288.29,-770.76 -234.25,-824.8 cw(c-267.52,-858.07) -220.47,-858.07 -220.47,-932.99 ccw(c-120.47,-932.99) -191.18,-1003.7 -155.89,-1038.99 ccw(c-112.2,-995.31) v1(-112.2,-1057.09)
  Bottom Layer w27.56: P3.5@-1537.4,-29.53 P3.5@-1322.83,-29.53 ; v1(-112.2,-1057.09) -109.61,-1057.09 U5.15
NetP4_2: P4.2 U5.13 | length 802.2
  Top Layer w31.5: P4.2@-29.53,-1537.4 -25.59,-1533.46 -25.59,-1161.42 v1(41.34,-1094.49)
  Bottom Layer w31.5: P4.2@-29.53,-1537.4 P4.2@-29.53,-1322.83 ; v1(41.34,-1094.49) 29.53,-1082.68 29.53,-1059.37 U5.13
NetP4_3: P4.3 U5.14 | length 634.5
  Bottom Layer w31.5: U5.14 -23.62,-1041.8 -23.62,-1106.3 68.9,-1198.82 68.9,-1322.83 P4.3@68.9,-1537.4
NetP4_4: P4.4 U5.11 | length 507.1
  Bottom Layer w31.5: U5.11 104.33,-1125.98 104.33,-1157.48 167.32,-1220.47 167.32,-1322.83 P4.4@167.32,-1537.4
NetP4_5: P4.5 U5.12 | length 710.9
  Bottom Layer w27.56: U5.12 169.45,-990.16 226.38,-990.16 287.4,-1051.18 287.4,-1187.01 265.75,-1208.66 265.75,-1322.83 P4.5@265.75,-1537.4
NetR1_1: R1.1 U1.6 U2.6 U4.27 | length 1518.9
  Top Layer w10: v1(-375.98,125.98) -387.8,114.17 -387.8,-15.75 -352.36,-51.18 ; U1.6 -257.87,155.51 -275.59,137.8 -275.59,25.59 -352.36,-51.18 ; U2.6 49.21,-259.84 -368.11,-259.84 -383.86,-244.09 -383.86,-222.44 -350.39,-188.98 v1(-344.49,-194.88) -318.9,-169.29 -318.9,-84.65 -352.36,-51.18
  Bottom Layer w10: U4.27 -482.17,-192.91 -336.61,-192.91 -338.58,-194.88 v1(-344.49,-194.88) ; R1.1 -405.51,204.72 -377.17,176.39 v1@-377.17,125.98
NetR2_1: R2.1 U1.1 U2.1 U4.28 | length 1305.5
  Top Layer w10: v1(-352.36,181.1) -348.43,181.1 U1.1 ; U1.1@-326.77,155.51 -381.54,155.51 -409.45,127.61 -409.45,-21.65 -352.36,-78.74 v1(-352.36,-157.48) -413.87,-218.98 -413.87,-251.49 -383.86,-281.5 23.62,-281.5 64.96,-322.83 U2.1
  Bottom Layer w10: U4.28@-490.36,-137.59 -455.5,-172.45 -375.2,-172.45 -360.24,-157.48 v1(-352.36,-157.48) ; v1(-352.36,181.1) -352.36,183.07 -330.71,204.73 R2.1
NetR9_1: R9.1 R11.2 U6.5 | length 211.9
  Bottom Layer w10: R9.1 -1112.2,482.28 R11.2 -1100.39,474.41 -996.56,474.41 U6.5
NetR10_1: R10.1 U6.14 | length 178.6
  Bottom Layer w10: R10.1 -960.63,289.37 -951.28,298.72 U6.14
NetR12_2: R12.2 U6.1 | length 116.5
  Bottom Layer w10: R12.2 -1100.39,356.3 U6.1
NetU4_9: U4.9 U5.1 | length 451.8
  Bottom Layer w10: U4.9 -119.69,-332.68 -106.3,-332.68 92.52,-531.5 137.21,-531.5 U5.1
NetU4_10: U4.10 U5.2 | length 555.4
  Bottom Layer w10: U4.10 -145.11,-351.8 -122.61,-351.8 95.61,-570.02 95.61,-587.73 144.55,-636.68 169.37,-636.68 U5.2
NetU4_11: U4.11 U5.3 | length 623.4
  Bottom Layer w10: U4.11@-215.91,-336.39 U4.11 -171.65,-369.8 -143.98,-369.8 68.9,-582.68 68.9,-591.27 152.83,-675.2 201.56,-675.2 U5.3
NetU4_12: U4.12 U5.4 | length 686.1
  Bottom Layer w10: U4.12 -198.19,-387.8 -159.44,-387.8 43.31,-590.55 43.31,-600.39 161.42,-718.5 228.97,-718.5 U5.4
NetU4_13: U4.13 U5.5 | length 750.7
  Bottom Layer w10: U4.13 -255.03,-380.8 -224.41,-411.42 -171.26,-411.42 19.69,-602.36 19.69,-612.2 159.45,-751.97 266.21,-751.97 U5.5
NetU4_14: U4.14 U5.6 | length 803.3
  Bottom Layer w10: U4.14 -236.22,-438.86 -187.12,-438.86 159.45,-785.43 303.46,-785.43 U5.6
NetU4_23: U4.23 U5.8 | length 1366.4
  Top Layer w10: v1(-368.11,-326.77) -342.52,-352.36 -143.7,-352.36 -27.56,-468.5 v1(-27.56,-687.01)
  Bottom Layer w10: U4.23 -516.93,-289.44 -448.75,-289.44 -405.51,-332.68 -404.73,-331.9 -361.43,-331.9 -366.55,-326.77 v1(-368.11,-326.77) ; v1(-27.56,-687.01) -17.72,-687.01 157.48,-862.2 368.11,-862.2 U5.8
NetU4_24: U4.24 U5.7 | length 1327.9
  Top Layer w10: v1@-393.7,-305.12 -390.54,-301.96 -325.99,-301.96 -301.18,-326.77 -129.92,-326.77 -1.97,-454.72 -1.97,-667.32 v1(29.53,-698.82)
  Bottom Layer w10: U4.24 -539.2,-267.17 -433.62,-267.17 v1(-393.7,-307.09) ; v1(29.53,-698.82) 155.51,-824.8 334.8,-824.8 U5.7
RST: CON1.5 P2.3 R7.2 U4.29 | length 3405.2
  Top Layer w10: v1(-419.29,-147.64) -431.1,-135.83 -431.1,141.73 v1(-413.39,159.45) ; v1(251.97,218.5) 265.75,218.5 456.69,27.56 v1(456.69,-57.09)
  Bottom Layer w10: CON1.5@-1007.87,-72.83 -1086.61,-72.83 -1112.2,-98.43 -1112.2,-240.16 -1046.06,-306.31 -690.17,-306.31 -625.98,-242.13 -625.98,-196.85 -515.75,-86.61 -499.38,-86.61 U4.29 -466.06,-116.61 -435.04,-147.64 v1(-419.29,-147.64) ; v1(-413.39,159.45) -409.45,159.45 -482.28,232.28 R7.2 -515.75,232.28 -547.24,263.78 -547.24,545.28 -500,592.52 11.81,592.52 159.45,444.88 159.45,311.02 v1(251.97,218.5) ; P2.3 439.76,-40.16 v1(456.69,-57.09)
RX: CON1.6 U4.30 | length 747
  Bottom Layer w10: CON1.6@-1007.87,-172.83 -1007.87,-238.19 -982.28,-263.78 -748.03,-263.78 -655.51,-171.26 -631.89,-171.26 -515.75,-55.12 -484.25,-55.12 -457.96,-81.41 -457.96,-94.34 U4.30
SCK: P2.4 U4.17 | length 2265.5
  Top Layer w10: v1(281.5,-41.34) 267.72,-41.34 252.75,-56.31 252.75,-496.84 507.87,-751.97 v1(507.87,-990.16)
  Bottom Layer w10: U4.17 -346.87,-498.03 -324.8,-498.03 129.92,-952.76 334.65,-952.76 372.05,-990.16 v1(507.87,-990.16) ; v1(281.5,-41.34) 282.68,-40.16 P2.4
TX: CON1.3 U4.31 | length 505.2
  Bottom Layer w10: CON1.3@-830.71,-222.83 -756.3,-222.83 -675.2,-141.73 -635.83,-141.73 -521.65,-27.56 -469.35,-27.56 U4.31
VCC: C17.2 C18.2 C19.2 P3.1 P4.1 R9.2 U5.10 U6.7 U6.8 U6.@-921.75,441.93 | length 6389.4
  Top Layer w39.37: P4.1@-127.95,-1537.4 -47.24,-1618.11 521.65,-1618.11 586.61,-1553.15 v1(602.36,-1553.15) ; v1(200.79,-1163.39) 545.28,-1507.87 586.61,-1507.87
  Bottom Layer w19.68: -1173.23,649.61 -1171.26,647.64 R9.2
  Bottom Layer w31.5: -918.67,450.79 -918.67,478.96 -901.57,496.06
  Bottom Layer w39.37: P3.1@-1537.4,364.17 -1322.83,364.17 -1322.83,568.9 -1242.13,649.61 -1173.23,649.61 -917.32,649.61 -891.73,624.02 ; -901.57,496.06 C19.2 -807.09,571.36 C18.2 C17.2 -891.73,624.02 ; P4.1@-127.95,-1537.4 P4.1@-127.95,-1322.83 ; v1(200.79,-1163.39) 200.79,-1124.02 ; v1(602.36,-1553.15) 590.55,-1553.15 586.61,-1549.21 586.61,-1383.86 635.83,-1334.65 635.83,19.6 ccw(c535.83,19.6) 606.54,90.31 478.11,218.74 ccw(c407.4,148.03) 407.4,248.03 385.91,248.03 cw(c385.91,348.03) 315.2,277.32 247.79,344.73 cw(c318.5,415.44) 218.5,415.44 218.5,438.98 ccw(c156.72,438.98) 200.41,482.66 64.72,618.35 ccw(c-5.99,547.64) -5.99,647.64 -868.11,647.64 -891.73,624.02
  other v1: 568.9,-1553.15 568.9,-1505.91 602.36,-1505.91
pads on no net: P2. P3. P3.6 P4. P4.6 U4.19 U4.22 U6.2 U6.6 Y1.3

## Polygon pours and split planes (outlines as drawn)
GND on Top Layer "Top Layer-GND" (solid, remove dead copper, pour order 1): -523.26,-486.78 -488.75,-521.29 -457.2,-558.54 -428.84,-598.26 -403.85,-640.19 -382.42,-684.04 -364.67,-729.51 -350.75,-776.29 -340.73,-824.06 -334.69,-872.49 -332.68,-921.26 -332.68,-1669.29 690.95,-1669.29 690.95,-80.67 688.86,-40.23 682.64,-0.21 672.33,38.96 658.05,76.86 639.96,113.1 618.24,147.28 593.12,179.05 564.87,208.07 533.79,234.04 500.21,256.68 464.48,275.74 426.97,291.04 388.1,302.4 367.51,309.34 348.55,319.92 331.84,333.81 317.96,350.51 307.37,369.48 300.43,390.07 289.07,428.94 273.78,466.44 254.71,502.18 232.07,535.76 206.11,566.84 177.08,595.09 145.31,620.21 111.13,641.93 74.89,660.02 36.99,674.3 -2.18,684.6 -42.2,690.83 -82.64,692.91 -1671.26,692.91 -1671.26,-330.71 -923.23,-330.71 -874.46,-332.73 -826.03,-338.76 -778.26,-348.78 -731.48,-362.71 -686.01,-380.45 -642.16,-401.89 -600.23,-426.87 -560.5,-455.23
GND on Top Layer "GND_t" (solid, pour order 0): -523.26,-486.78 -488.75,-521.29 -457.2,-558.54 -428.84,-598.26 -403.85,-640.19 -382.42,-684.04 -364.67,-729.51 -350.75,-776.29 -340.73,-824.06 -334.69,-872.49 -332.68,-921.26 -332.68,-1669.29 690.95,-1669.29 690.95,-80.67 688.86,-40.23 682.64,-0.21 672.33,38.96 658.05,76.86 639.96,113.1 618.24,147.28 593.12,179.05 564.87,208.07 533.79,234.04 500.21,256.68 464.48,275.74 426.97,291.04 388.1,302.4 367.51,309.34 348.55,319.92 331.84,333.81 317.96,350.51 307.37,369.48 300.43,390.07 289.07,428.94 273.78,466.44 254.71,502.18 232.07,535.76 206.11,566.84 177.08,595.09 145.31,620.21 111.13,641.93 74.89,660.02 36.99,674.3 -2.18,684.6 -42.2,690.83 -82.64,692.91 -1671.26,692.91 -1671.26,-330.71 -923.23,-330.71 -874.46,-332.73 -826.03,-338.76 -778.26,-348.78 -731.48,-362.71 -686.01,-380.45 -642.16,-401.89 -600.23,-426.87 -560.5,-455.23
GND on Bottom Layer "GND_b" (solid, remove dead copper, pour order 2): -523.26,-486.78 -488.75,-521.29 -457.2,-558.54 -428.84,-598.26 -403.85,-640.19 -382.42,-684.04 -364.67,-729.51 -350.75,-776.29 -340.73,-824.06 -334.69,-872.49 -332.68,-921.26 -332.68,-1669.29 690.95,-1669.29 690.95,-80.67 688.86,-40.23 682.64,-0.21 672.33,38.96 658.05,76.86 639.96,113.1 618.24,147.28 593.12,179.05 564.87,208.07 533.79,234.04 500.21,256.68 464.48,275.74 426.97,291.04 388.1,302.4 367.51,309.34 348.55,319.92 331.84,333.81 317.96,350.51 307.37,369.48 300.43,390.07 289.07,428.94 273.78,466.44 254.71,502.18 232.07,535.76 206.11,566.84 177.08,595.09 145.31,620.21 111.13,641.93 74.89,660.02 36.99,674.3 -2.18,684.6 -42.2,690.83 -82.64,692.91 -1671.26,692.91 -1671.26,-330.71 -923.23,-330.71 -874.46,-332.73 -826.03,-338.76 -778.26,-348.78 -731.48,-362.71 -686.01,-380.45 -642.16,-401.89 -600.23,-426.87 -560.5,-455.23

## Keep-outs
Keep-Out Layer:
  the board outline again, w7.87

## Other copper
Top Layer:
  rectangle net VCC: 543.31,-1580.71 624.02,-1472.44
  rectangle net NetL1_1: -881.89,320.87 -612.2,375.98
  rectangle net NetL1_2: -881.89,397.64 -612.2,450.79
Bottom Layer:
  rectangle net VCC: 543.31,-1580.71 624.02,-1472.44
  region net NetL1_2: -610.24,425.2 -706.69,425.2 -706.69,401.57 -610.24,401.57
  rectangle net NetL1_1: -706.69,348.43 -610.24,372.05
  rectangle net GND: -832.68,314.96 -781.5,438.98
  rectangle net NetL1_1: -881.89,320.87 -852.36,372.05
  rectangle net NetL1_1: -937.01,346.46 -852.36,372.05
  rectangle net NetL1_2: -881.89,399.61 -852.36,450.79
  rectangle net NetL1_2: -937.01,399.61 -852.36,425.2
  region net VCC: 190.94,-1179.13 147.64,-1135.83 212.6,-1070.87 228.35,-1086.61 230.31,-1086.61 230.32,-1161.42 212.6,-1179.13

## Silkscreen, mask and mechanical layers (free items; w line width, h text height)
Top Overlay:
  drawing of 592 lines, arcs and shapes, not listed
  text "Koruza" at -1240.16,307.09 h59.06
  text "move" at -1181.1,196.85 h59.06
  text "driver" at -1228.35,84.65 h59.06
  text "www.koruza.net" at -248.03,-775.59 h59.06
  text "v1.0" at -248.03,-864.17 h59.06
  text "No:" at -248.03,-944.88 h59.06
Bottom Overlay:
  drawing of 592 lines, arcs and shapes, not listed
  text "-" at -1159.45,35.43 h39.37
  text "+" at -1094.49,0 h39.37
  text "MOSI" at 606.3,-7.87 h39.37
  text "+" at 669.29,-15.75 h39.37
  text "R" at -1153.54,-41.34 h39.37
  text "SCK" at 608.27,-62.99 h39.37
  text "R" at 667.32,-62.99 h39.37
  text "IO" at -1098.43,-94.49 h39.37
  text "MISO" at 604.33,-114.17 h39.37
  text "-" at 667.32,-118.11 h39.37
  text "RX" at -1143.7,-147.64 h39.37
  text "TX" at -1088.58,-202.76 h39.37
  text "v1.0" at 643.7,-1190.94 h98.43

## Dimensions
0,0 to 690.95,-80.67 on Mechanical 1
0,0 to -82.64,692.91 on Mechanical 1
454.72,-389.76 to 690.95,-1669.29 on Mechanical 1
-391.73,456.69 to -1671.26,692.91 on Mechanical 1
-1671.26,692.91 to -1671.26,-330.71 on Mechanical 1
-1671.26,692.91 to -332.68,-1669.29 on Mechanical 1
-1671.26,692.91 to 690.95,-80.67 on Mechanical 1